# Altium PCB esp32_c6_a1.PcbDoc
Units mm, origin at the board's own origin, x right, y up, seen from the top; angles counter-clockwise.
Board outline 50 x 20 mm, 4 copper layers (Top Layer, P1, P2, Bottom Layer), stack 0.97 mm thick; 102 components, 44 nets, 244 pads, 294 vias.
Unrouted connection lines stored in the file: 1.
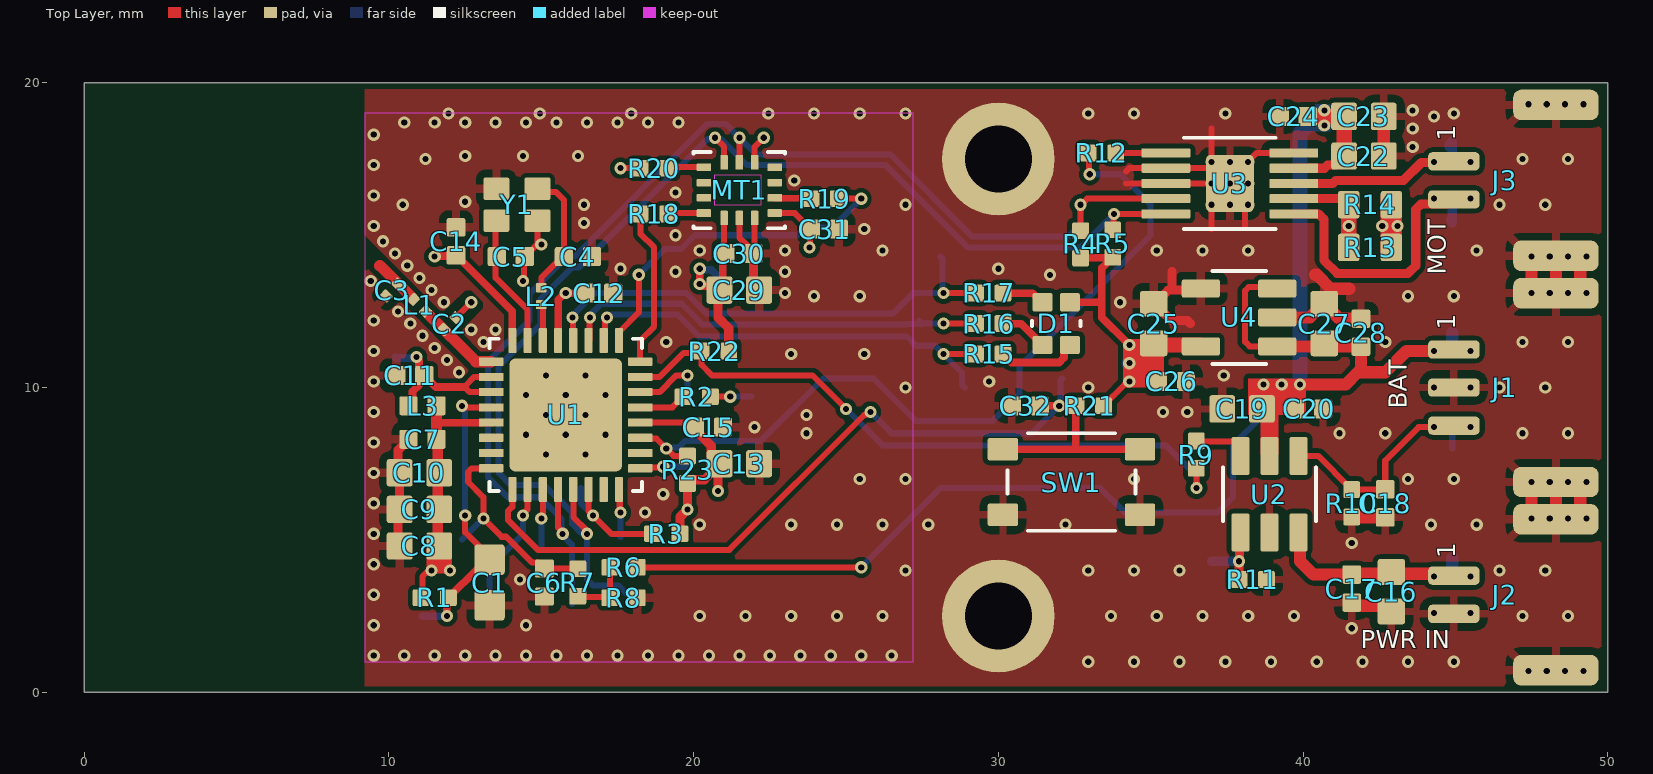
[diagram p0: Top Layer view]
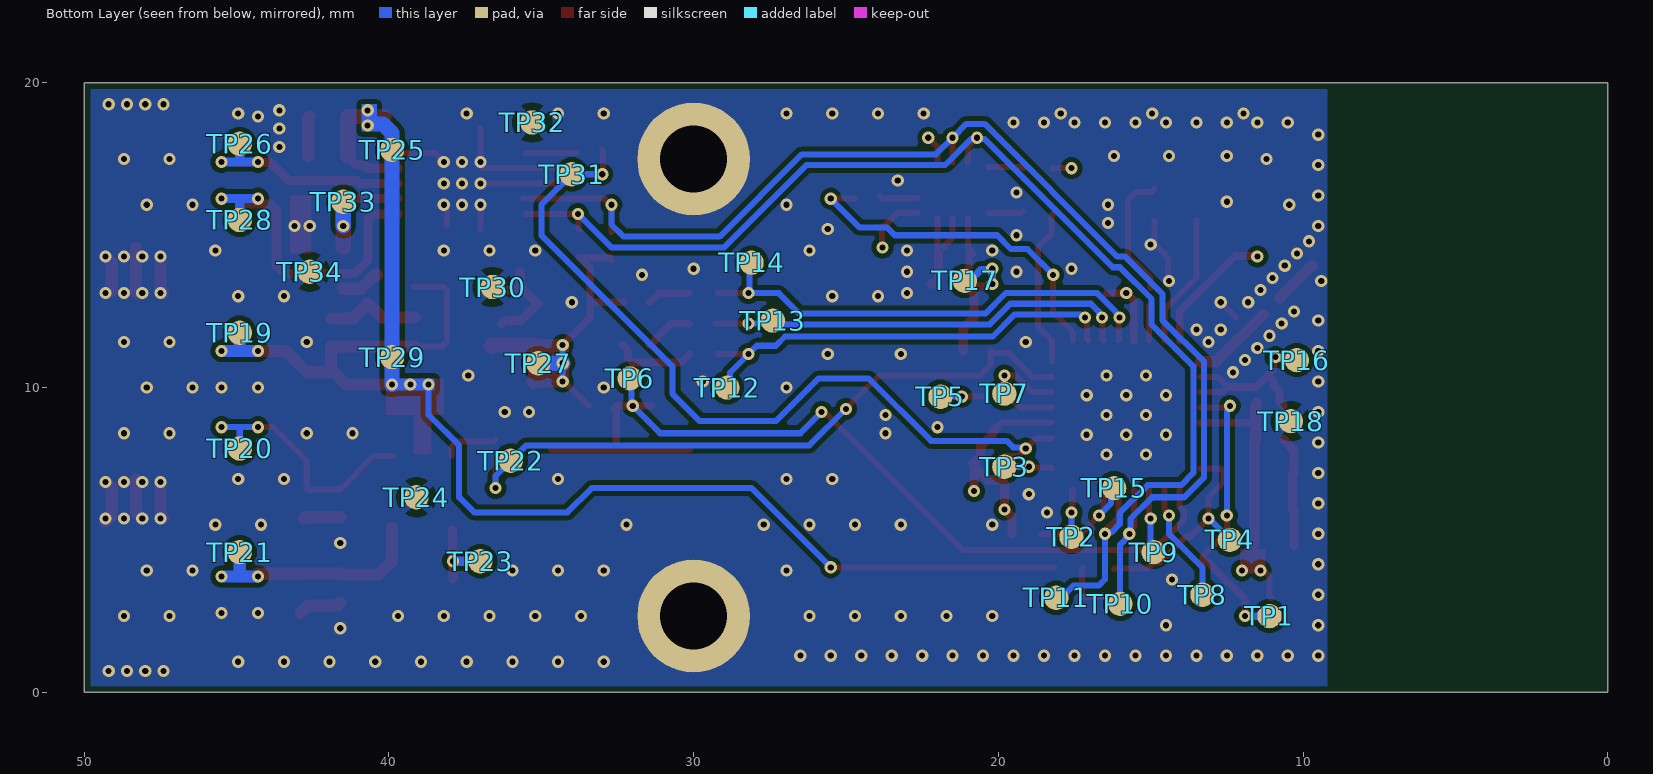
[diagram p1: Bottom Layer view, seen from below]
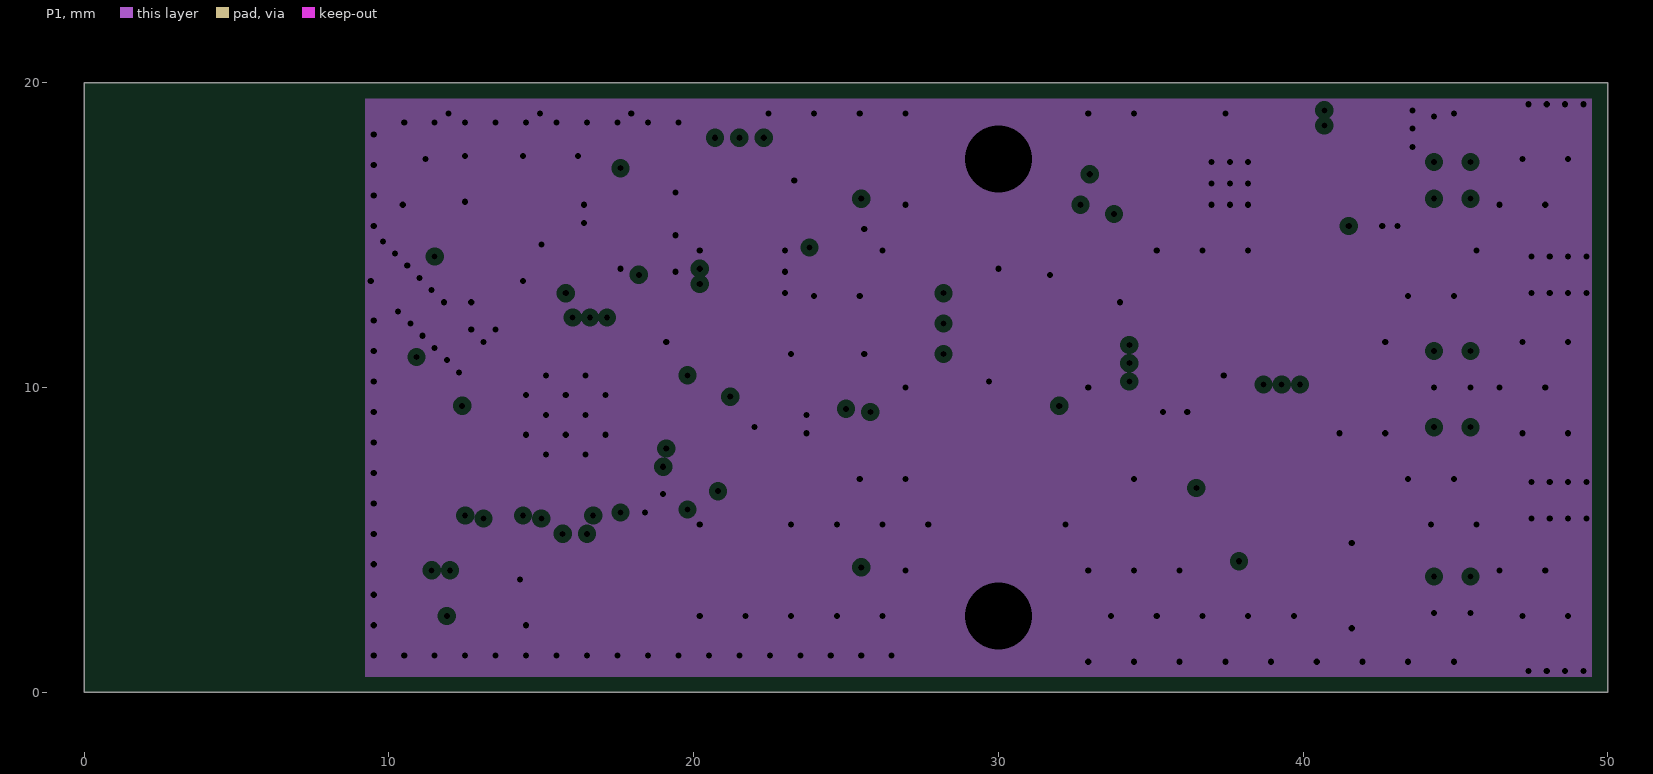
[diagram p2: P1, clearances drawn from the general rule]
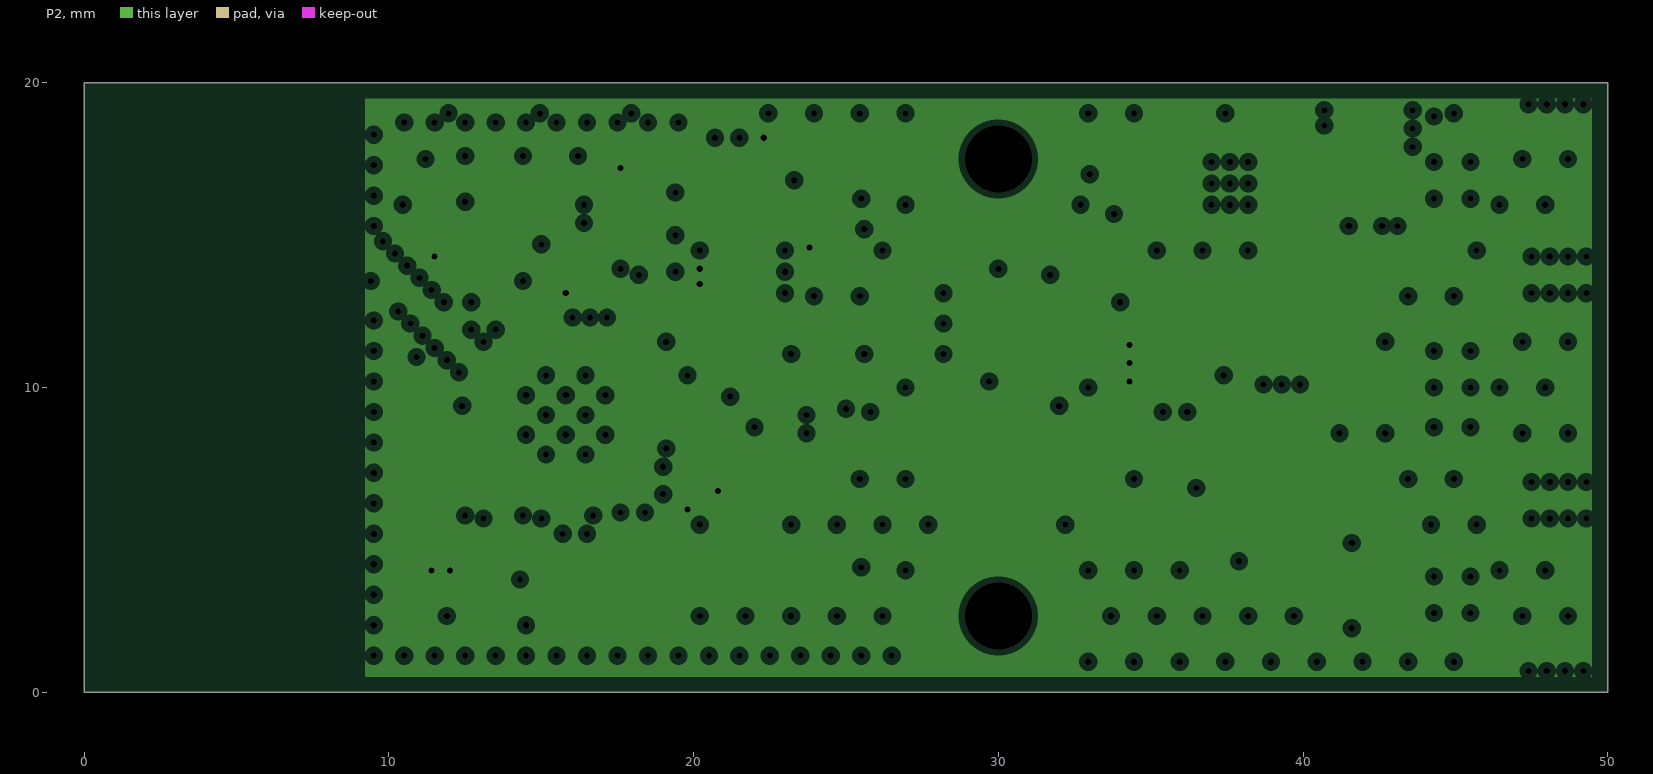
[diagram p3: P2, clearances drawn from the general rule]
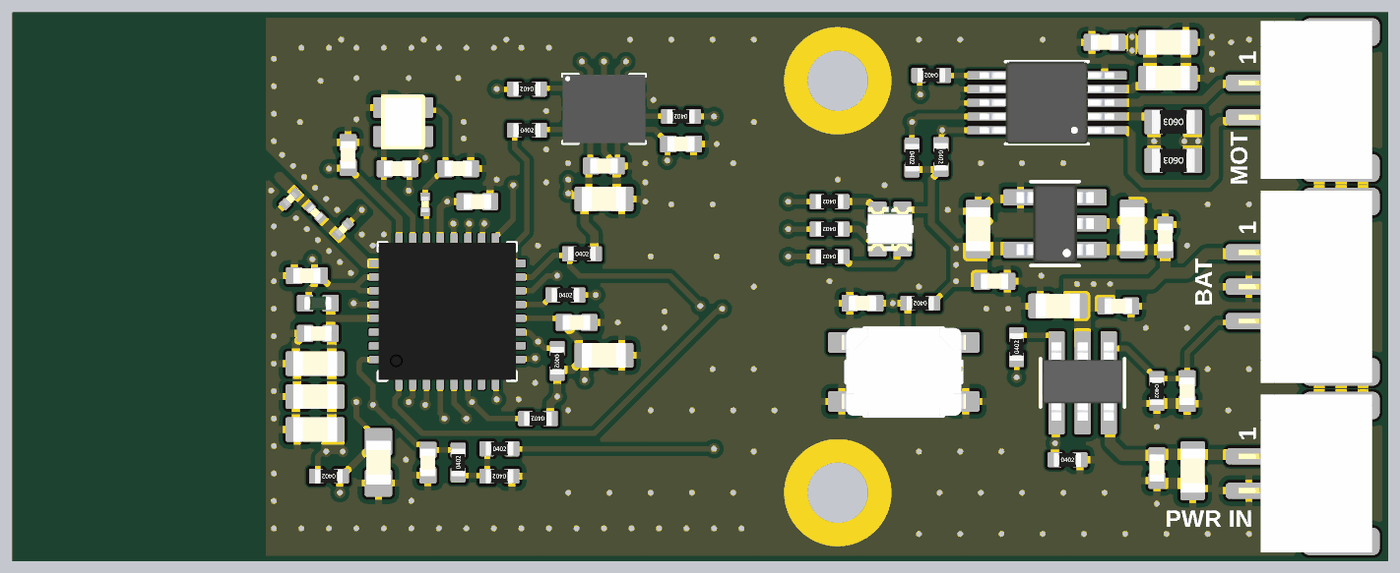
[diagram p4: 3D render of the assembled board from above, using the file's embedded part models]

## Layer stack, top to bottom
Top Solder: solder mask 0.0102, Solder Resist, Dk 3.5
Top Layer: signal copper 0.035
D1: dielectric 0.21, FR-4, Dk 4.4
P1: plane copper 0.0152, net GND
D2: dielectric 0.45, FR-4, Dk 4.6
P2: plane copper 0.0152, net +3V3
D3: dielectric 0.21, FR-4, Dk 4.4
Bottom Layer: signal copper 0.035
Bottom Solder: solder mask 0.0102, Solder Resist, Dk 3.5

## Board outline
0,0 50,0 50,20 0,20

## Design rules (kind name [scope] priority, off if disabled: settings)
BoardOutlineClearance [All] p1: gap=0.2 ignorepadtopadclearanceinfootprint=FALSE
Clearance Clearance_TPs [HasFootprint('tp_round_80') vs HasFootprint('tp_round_80')] p1: gap=1.2 ignorepadtopadclearanceinfootprint=TRUE
Clearance [All] p2: gap=0.152 ignorepadtopadclearanceinfootprint=TRUE except(0.254: THPad-THPad THPad-Via THPad-Fill THPad-Poly THPad-Region THPad-Text THPad-Hole)
Height [All] p1: minheight=0 maxheight=35 prefheight=12.7
HoleSize [All] p1: absolutevalues=TRUE maxlimit=5 minlimit=0.2 maxpercent=80.000 minpercent=20.000
HoleToHoleClearance [All] p1: gap=0.25 allowstackedmicrovias=TRUE
Length [All] p1: maxlimit=2540 minlimit=0
MatchedLengths MatchedLengths_DSI [InDifferentialPairClass('DSI')] p1: tolerance=0.5 checknetsindiffpair=FALSE checkdiffpairvsdiffpair=TRUE checkxsignals=TRUE checkothers=TRUE
MatchedLengths MatchedLengths_HDMI [InDifferentialPairClass('HDMI')] p2: tolerance=0.5 checknetsindiffpair=FALSE checkdiffpairvsdiffpair=TRUE checkxsignals=TRUE checkothers=TRUE
MatchedLengths MatchedLengths_ETH [InDifferentialPairClass('ETH')] p3: tolerance=0.5 checknetsindiffpair=FALSE checkdiffpairvsdiffpair=TRUE checkxsignals=TRUE checkothers=TRUE
MatchedLengths [InAnyDifferentialPair] p4: tolerance=0.5 checknetsindiffpair=TRUE checkdiffpairvsdiffpair=FALSE checkxsignals=FALSE checkothers=FALSE
MinimumAnnularRing [All] p1: minimumring=0.1
MinimumSolderMaskSliver [All] p1: minsoldermaskwidth=0.01
NetAntennae [All and not InNetClass('Antenna')] p1: netantennaetolerance=0
PlaneClearance [All] p1: clearance=0.2
PlaneConnect [All] p1: pad.planeconnectstyle=Relief pad.reliefexpansion=0.508 pad.reliefentries=4 pad.reliefconductorwidth=0.254 pad.reliefairgap=0.254 via.planeconnectstyle=Direct via.reliefexpansion=0.508 via.reliefentries=4 via.reliefconductorwidth=0.254 via.reliefairgap=0.254
PolygonConnect [All] p1: thpad.connectstyle=Relief thpad.reliefconductorwidth=0.254 thpad.reliefentries=4 thpad.polygonreliefangle="90 Angle" thpad.airgapwidth=0.254 thpad.conductorbypadedge=TRUE thpad.mindistance=0.381 thpad.enablemindistance=FALSE smdpad.connectstyle=Relief smdpad.reliefconductorwidth=0.254 smdpad.reliefentries=4 smdpad.polygonreliefangle="90 Angle" smdpad.airgapwidth=0.254 smdpad.conductorbypadedge=TRUE smdpad.mindistance=0.381 smdpad.enablemindistance=FALSE via.connectstyle=Direct via.reliefconductorwidth=0.254 via.reliefentries=4 via.polygonreliefangle="90 Angle" via.airgapwidth=0.254
RoutingVias [All] p1: holewidth=0.3 width=0.5 viastyle="Through Hole" minholewidth=0.2 minwidth=0.45 maxholewidth=0.3 maxwidth=0.6 useviatemplates=TRUE viatemplateguid#1={9D186E32-C681-4B0F-AA81-C389DA1EADFB} viatemplateguid#2={45BA9FE7-AB63-4574-B158-BBA0DE552227} viatemplatename#1=v40h20m0mx0(Tol5-5) viatemplatename#2=v50h30m0mx0(Tol5-5)
SilkToSilkClearance [All] p1: silktosilkclearance=0.1
SilkToSolderMaskClearance [IsPad] p1: minsilkscreentomaskgap=0.1 clearancetoexposedcopper=TRUE
SolderMaskExpansion [All] p1: expansion=0.102 istentingtop=FALSE
StubLength [All] p1: limit=25.4
SupplyNets "Schematic Supply Nets_4" [InNet('+3V3P')] p1: voltage=0.000
SupplyNets "Schematic Supply Nets_3" [InNet('GND')] p2: voltage=0.000
SupplyNets "Schematic Supply Nets_2" [InNet('+V_POWER_IN')] p3: voltage=0.000
SupplyNets "Schematic Supply Nets_1" [InNet('+V_BAT')] p4: voltage=0.000
SupplyNets "Schematic Supply Nets" [InNet('+3V3')] p5: voltage=0.000
ViasUnderSMD [All] p1: allowed=TRUE
Width Width_Antenna [InNetClass('Antenna')] p1: maxlimit=0.368 minlimit=0.368 preferedwidth=0.368 impedanceprofiledriven=TRUE impedanceprofileid={4490BFD0-1E95-46B7-8834-676BFD36805F} impedanceprofilevalue=50.000000 minimp=50.000000 maximp=50.000000 favimp=50.000000
Width [All] p2: maxlimit=3 minlimit=0.152 preferedwidth=0.254 minimp=50.000000 maximp=50.000000 favimp=50.000000
21 further rules are at their usual default settings.

## Classes and differential pairs
net class Antenna: LNA_IN RF_ANTENNA
component class SoC: C1 C2 C3 C4 C5 C6 C7 C8 C9 C10 C11 C12 C13 C14 C15 L1 L2 L3 R1 R2 R3 R4 R5 R6 R7 R8 R22 R23 TP1 TP2 TP3 TP4 TP5 TP6 TP7 TP8 TP9 TP10 TP11 TP12 TP13 TP14 TP15 TP16 TP17 TP18 U1 Y1
component class Sensors: C29 C30 C31 C32 D1 MT1 R15 R16 R17 R18 R19 R20 R21 SW1
component class Power: C16 C17 C18 C19 C20 C22 C23 C24 C25 C26 C27 C28 J1 J2 J3 R9 R10 R11 R12 R13 R14 TP19 TP20 TP21 TP22 TP23 TP24 TP25 TP26 TP27 TP28 TP29 TP30 TP31 TP32 TP33 TP34 U2 U3 U4

## Components (designator, comment, footprint, x,y, rotation, side; value= is the part's Value field where it differs from the comment)
C1 "0603" C_0603#1 13.3,3.6 r90 top value=1u
C2 "0201" C_0201 12,12.1 r225 top value=TBD
C3 "0201" C_0201 10.1,13.2 r45 top value=TBD
C4 "0402" C_0402 16.2,14.3 r0 top value=16pF
C5 "0402" C_0402 14,14.3 r0 top value=16pF
C6 "0402" C_0402 15.1,3.6 r90 top value=100n
C7 "0402" C_0402 11.1,8.3 r0 top value=100n
C8 "0603" C_0603#2 11,4.8 r0 top value=1u
C9 "0603" C_0603#2 11,6 r0 top value=4.7u
C10 "0603" C_0603#2 11,7.2 r0 top value=4.7u
C11 "0402" C_0402 10.7,10.4 r0 top value=100n
C12 "0402" C_0402 16.9,13.1 r180 top value=100n
C13 "0603" C_0603#2 21.5,7.5 r180 top value=1u
C14 "0402" C_0402 12.2,14.8 r270 top value=100n
C15 "0402" C_0402 20.5,8.7 r180 top value=100n
C16 "0603" C_0603#2 42.9,3.3 r90 top value=4.7u
C17 "0402" C_0402 41.6,3.4 r90 top value=100n
C18 "0402" C_0402 42.7,6.2 r90 top value=100n
C19 "0603" C_0603#2 38,9.3 r0 top value=4.7u
C20 "0402" C_0402 40.2,9.3 r180 top value=100n
C22 "0603" C_0603#2 42,17.6 r180 top value=4.7u
C23 "0603" C_0603#2 42,18.9 r180 top value=4.7u
C24 "0402" C_0402 39.7,18.9 r0 top value=100n
C25 "0603" C_0603#2 35.1,12.1 r270 top value=4.7u
C26 "0402" C_0402 35.7,10.2 r180 top value=100n
C27 "0603" C_0603#2 40.7,12.1 r270 top value=4.7u
C28 "0402" C_0402 41.9,11.8 r270 top value=100n
C29 "0603" C_0603#2 21.5,13.2 r180 top value=4.7u
C30 "0402" C_0402 21.5,14.4 r0 top value=100n
C31 "0402" C_0402 24.3,15.2 r0 top value=10n
C32 "0402" C_0402 30.9,9.4 r180 top value=100n
D1 "EAST1616RGBA3" LED_EAST1616RGBA3 31.9,12.1 r90 top
J1 "SM03B-GHS-TB" jst_sm03b-ghs-tb 46.9,10 r90 top
J2 "SM02B-GHS-TB" JST-SM02B-GHS-TB 46.9,3.2 r90 top
J3 "SM02B-GHS-TB" JST-SM02B-GHS-TB 46.9,16.8 r90 top
L1 "0201" L_0201 11,12.7 r135 top value=TBD
L2 "0201" L_0201 15,13 r270 top value=?
L3 "0402" L_0402 11.1,9.4 r180 top value=2nH
MT1 "ICM-42605" XDCR_ICM-42605 21.5,16.478 r0 top
R1 "0402" R_0402 11.5,3.1 r180 top value=10k
R2 "0402" R_0402 20.1,9.7 r0 top value=499R
R3 "0402" R_0402 19.1,5.2 r180 top value=10k
R4 "0402" R_0402 32.7,14.7 r270 top value=10k
R5 "0402" R_0402 33.752,14.726 r270 top value=10k
R6 "0402" R_0402 17.7,4.1 r0 top value=475k
R7 "0402" R_0402 16.2,3.6 r90 top value=499R
R8 "0402" R_0402 17.7,3.1 r180 top value=475k
R9 "0402" R_0402 36.5,7.8 r90 top value=33R
R10 "0402" R_0402 41.6,6.2 r270 top value=100k
R11 "0402" R_0402 38.35,3.7 r0 top value=2.7k
R12 "0402" R_0402 33.4,17.7 r180 top value=33R
R13 "0603" R_0603 42.2,14.6 r180 top value=1R
R14 "0603" R_0603 42.2,16 r180 top value=1R
R15 "0402" R_0402 29.7,11.1 r180 top value=499R
R16 "0402" R_0402 29.7,12.1 r180 top value=499R
R17 "0402" R_0402 29.7,13.1 r180 top value=499R
R18 "0402" R_0402 18.7,15.7 r0 top value=33R
R19 "0402" R_0402 24.3,16.2 r180 top value=33R
R20 "0402" R_0402 18.7,17.2 r180 top value=10k
R21 "0402" R_0402 33,9.4 r180 top value=10k
R22 "0402" R_0402 20.7,11.2 r0 top value=10k
R23 "0402" R_0402 19.8,7.3 r270 top value=10k
SW1 "TL3365AF180QG" SW_TL3365AF180QG 32.4,6.9 r180 top
TP1 "TP" tp_round_80 11.1,2.5 r90 bottom
TP2 "TP" tp_round_80 17.6,5.1 r90 bottom
TP3 "TP" tp_round_80 19.8,7.4 r90 bottom
TP4 "TP" tp_round_80 12.4,5 r90 bottom
TP5 "TP" tp_round_80 21.9,9.7 r90 bottom
TP6 "TP" tp_round_80 32.1,10.3 r90 bottom
TP7 "TP" tp_round_80 19.8,9.8 r90 bottom
TP8 "TP" tp_round_80 13.3,3.2 r90 bottom
TP9 "TP" tp_round_80 14.9,4.6 r90 bottom
TP10 "TP" tp_round_80 16,2.9 r90 bottom
TP11 "TP" tp_round_80 18.1,3.1 r90 bottom
TP12 "TP" tp_round_80 28.9,10 r90 bottom
TP13 "TP" tp_round_80 27.4,12.2 r90 bottom
TP14 "TP" tp_round_80 28.1,14.1 r90 bottom
TP15 "TP" tp_round_80 16.2,6.7 r90 bottom
TP16 "TP" tp_round_80 10.2,10.9 r90 bottom
TP17 "TP" tp_round_80 21.1,13.5 r90 bottom
TP18 "TP" tp_round_80 10.4,8.9 r90 bottom
TP19 "TP" tp_round_80 44.9,11.8 r90 bottom
TP20 "TP" tp_round_80 44.9,8 r90 bottom
TP21 "TP" tp_round_80 44.9,4.6 r90 bottom
TP22 "TP" tp_round_80 36,7.6 r90 bottom
TP23 "TP" tp_round_80 37,4.3 r90 bottom
TP24 "TP" tp_round_80 39.1,6.4 r90 bottom
TP25 "TP" tp_round_80 39.9,17.8 r90 bottom
TP26 "TP" tp_round_80 44.9,18 r90 bottom
TP27 "TP" tp_round_80 35.1,10.8 r180 bottom
TP28 "TP" tp_round_80 44.9,15.5 r90 bottom
TP29 "TP" tp_round_80 39.9,11 r90 bottom
TP30 "TP" tp_round_80 36.6,13.3 r180 bottom
TP31 "TP" tp_round_80 34,17 r90 bottom
TP32 "TP" tp_round_80 35.3,18.7 r90 bottom
TP33 "TP" tp_round_80 41.5,16.1 r90 bottom
TP34 "TP" tp_round_80 42.6,13.8 r90 bottom
U1 "ESP32-C6FH4" QFN50P500X500X90-33N 15.8,9.1 r0 top
U2 "BQ21040DBVT" SOT95P280X110-6N 38.9,6.5 r270 top
U3 "DRV8830DGQR" IC_XTR111AIDGQR 37.6,16.7 r180 top
U4 "TPS7A2033PDBVR" SOT95P280X110-5N 37.9,12.3 r180 top
Y1 "ECS-400-10-37B2-CKY-TR" XTAL_ECS-400-10-37B2-CKY-TR 14.2,16 r270 top

## Footprints (in the part's own frame and the unit in brackets; to place one, negate y for a bottom-side part, rotate by r counter-clockwise, add the part's x,y. Pads: shape width x height; smd on the part's side, far side on the other; paste and mask are expansions set on the pad)
C_0201 [mm] "Chip Capacitor"
  rrect20% 0.3x0.35 smd: 1(-0.275,0) 2(0.275,0)
  body extent -0.3,-0.15 0.3,0.15, height 0.32
C_0402 [mm] "Chip Capacitor, Body 1.0x0.6mm, IPC Medium Density"
  rrect20% 0.6x0.62 smd: 1(-0.46,0) 2(0.46,0)
  body extent -0.5,-0.27 0.5,0.28, height 0.5
C_0603#1 [mm] "Chip Capacitor, Body 1.6x0.8mm, IPC Medium Density"
  rrect20% 1x1 smd: 1(-0.75,0) 2(0.75,0)
  body extent -0.8,-0.45 0.8,0.45, height 0.81
C_0603#2 [mm] "Chip Capacitor, Body 1.6x0.8mm, IPC High Density"
  rrect20% 0.85x0.9 smd: 1(-0.65,0) 2(0.65,0)
  body extent -0.8,-0.45 0.8,0.45, height 0.81
IC_XTR111AIDGQR [mm]
  rrect20% 1.6x0.3 smd: 1(-2.1,1) 2(-2.1,0.5) 3(-2.1,0) 4(-2.1,-0.5) 5(-2.1,-1) 6(2.1,-1) 7(2.1,-0.5) 8(2.1,0) 9(2.1,0.5) 10(2.1,1)
  rrect20% 1.57x1.88 smd: 11(0,0)
  silkscreen extent -1.5,-1.5 1.5,1.5, body extent -2.45,-1.5 2.45,1.5, height 1.1
JST-SM02B-GHS-TB [mm]
  rrect50% 0.6x1.7 smd: 1(0.625,1.95) 2(-0.625,1.95)
  rrect50% 1x2.8 smd: MP1(-2.475,-1.4) MP2(2.475,-1.4)
  body extent -2.88,-2.52 2.88,2.33, height 4.35
jst_sm03b-ghs-tb [mm]
  rrect50% 0.6x1.7 smd: 1(1.25,1.95) 2(0,1.95) 3(-1.25,1.95)
  rrect50% 1x2.8 smd: MP1(-3.1,-1.4) MP2(3.1,-1.4)
  body extent -3.5,-2.52 3.5,2.33, height 4.3
L_0201 [mm] "Chip Inductor"
  rrect20% 0.3x0.35 smd: 1(-0.275,0) 2(0.275,0)
  body extent -0.3,-0.15 0.3,0.15, height 0.3
L_0402 [mm] "Chip Inductor, Body 1.0x0.6mm, IPC Medium Density"
  rrect20% 0.6x0.62 smd: 1(-0.46,0) 2(0.46,0)
  body extent -0.51,-0.25 0.51,0.25, height 0.52
LED_EAST1616RGBA3 [mm]
  rrect20% 0.6x0.65 smd: 1(0.7,0.45) 2(-0.7,0.45) 3(0.7,-0.45) 4(-0.7,-0.45)
  silkscreen extent -0.08,-0.8 0.08,0.8, body extent -0.8,-0.8 0.8,0.8, height 0.35
QFN50P500X500X90-33N [mm]
  rrect20% 0.81x0.27 smd mask+0.05: 1(-2.445,1.75) 2(-2.445,1.25) 3(-2.445,0.75) 4(-2.445,0.25) 5(-2.445,-0.25) 6(-2.445,-0.75) 7(-2.445,-1.25) 8(-2.445,-1.75) 17(2.445,-1.75) 18(2.445,-1.25) 19(2.445,-0.75) 20(2.445,-0.25) 21(2.445,0.25) 22(2.445,0.75) 23(2.445,1.25) 24(2.445,1.75)
  rrect20% 0.27x0.81 smd mask+0.05: 9(-1.75,-2.445) 10(-1.25,-2.445) 11(-0.75,-2.445) 12(-0.25,-2.445) 13(0.25,-2.445) 14(0.75,-2.445) 15(1.25,-2.445) 16(1.75,-2.445) 25(1.75,2.445) 26(1.25,2.445) 27(0.75,2.445) 28(0.25,2.445) 29(-0.25,2.445) 30(-0.75,2.445) 31(-1.25,2.445) 32(-1.75,2.445)
  rrect10% 3.7x3.7 smd paste-2539.97 mask+0.05: 33(0,0)
  silkscreen extent -2.5,-2.5 2.5,2.5, body extent -2.5,-2.5 2.5,2.5, height 1.05
R_0402 [mm] "Chip Capacitor, Body 1.0x0.5mm, IPC High Density"
  rrect20% 0.55x0.55 smd: 1(-0.45,0) 2(0.45,0)
  body extent -0.5,-0.25 0.5,0.25, height 0.35
R_0603 [mm] "Chip Capacitor, Body 1.6x0.8mm, IPC High Density"
  rrect20% 0.7x0.9 smd: 1(-0.7,0) 2(0.7,0)
  body extent -0.77,-0.43 0.77,0.43, height 0.45
SOT95P280X110-5N [mm]
  rrect20% 1.25x0.59 smd: 1(-1.255,0.95) 2(-1.255,0) 3(-1.255,-0.95) 4(1.255,-0.95) 5(1.255,0.95)
  silkscreen extent -0.88,-1.53 0.88,1.53, body extent -1.4,-1.45 1.4,1.45, height 1.45
SOT95P280X110-6N [mm]
  rrect20% 1.25x0.59 smd: 1(-1.255,0.95) 2(-1.255,0) 3(-1.255,-0.95) 4(1.255,-0.95) 5(1.255,0) 6(1.255,0.95)
  silkscreen extent -0.88,-1.53 0.88,1.53, body extent -1.47,-1.46 1.37,1.46, height 1.14
SW_TL3365AF180QG [mm]
  rrect20% 1x0.75 smd: 1(-2.25,-1.075) 2(2.25,-1.075) 3(-2.25,1.075) 4(2.25,1.075)
  silkscreen extent -2.1,-1.6 2.1,1.6, body extent -2.25,-1.6 2.25,1.6, height 2.53
tp_round_80 [mm]
  round 0.8 smd paste-1 mask+0.05: 1(0,0)
XDCR_ICM-42605 [mm]
  rrect20% 0.475x0.25 smd paste-1 mask+0.05: 1(-1.162,0.75) 2(-1.162,0.25) 3(-1.162,-0.25) 4(-1.162,-0.75) 8(1.162,-0.75) 9(1.162,-0.25) 10(1.162,0.25) 11(1.162,0.75)
  rrect20% 0.25x0.475 smd paste-1 mask+0.05: 5(-0.5,-0.913) 6(0,-0.913) 7(0.5,-0.913) 12(0.5,0.913) 13(0,0.913) 14(-0.5,0.913)
  Top Layer keep-out region: 0.7,-0.5 -0.8,-0.5 -0.8,0.5 0.7,0.5
  silkscreen extent -1.5,-1.25 1.5,1.25, body extent -1.5,-1.25 1.5,1.25, height 0.95
XTAL_ECS-400-10-37B2-CKY-TR [mm]
  rrect20% 0.75x0.85 smd: 1(-0.525,0.675) 2(-0.525,-0.675) 3(0.525,-0.675) 4(0.525,0.675)
  body extent -0.8,-1 0.8,1, height 0.5

## Part data
C1 C8 C13: library part C_0603, "SMD 0603 Ceramic Chip Capacitor", Manufacturer=Samsung, MPN=CL10B105KP8NNNC, Part Number=?, Cad Data=?, List Code=?
C2 C3: library part C_0201, "SMD 0201 Ceramic Chip Capacitor", Manufacturer=?, Cad Data=?, List Code=?, Part Number=?
C4 C5: library part C_0402, "SMD 0402 Ceramic Chip Capacitor", Manufacturer=Murata, MPN=GJM1555C1H160FB01J, Part Number=?, Cad Data=?, List Code=?
C6 C7 C11 C12 C14 C15 C17 C18 C20 C24 C26 C28 C30 C32: library part C_0402, "SMD 0402 Ceramic Chip Capacitor", Manufacturer=Samsung, MPN=CL05B104KP5NNNC, Part Number=?, Cad Data=?, List Code=?
C9 C10 C16 C19 C22 C23 C25 C27 C29: library part C_0603, "SMD 0603 Ceramic Chip Capacitor", Manufacturer=Samsung, MPN=CL10A475KP8NNNC, Part Number=?, Cad Data=?, List Code=?
C31: library part C_0402, "SMD 0402 Ceramic Chip Capacitor", Manufacturer=Samsung, MPN=CL05B103KB5NNNC, Part Number=?, Cad Data=?, List Code=?
D1: "Red, Green, Blue (RGB) - LED Indication - Discrete 1.95V Red, 2.8V Green, 2.8V Blue 0606 (1616 Metric)", Package="0606 Everlight", Availability="In Stock", Check_prices=https://www.snapeda.com/parts/EAST1616RGBA3/Everlight+Electronics+Co+Ltd/view-part/?ref=eda, MF="Everlight Electronics", MP=EAST1616RGBA3, Price=None, Purchase-URL=https://pricing.snapeda.com/search/part/EAST1616RGBA3/?ref=eda, SnapEDA_Link=https://www.snapeda.com/parts/EAST1616RGBA3/Everlight+Electronics+Co+Ltd/view-part/?ref=snap
J1: "CONN HEADER SMD 3POS 1.25MM", Manufacturer=JST, MPN=SM03B-GHS-TB
J2 J3: "CONN HEADER SMD 2POS 1.25MM", Manufacturer=JST, MPN=SM02B-GHS-TB
L1 L2: library part L_0201, "SMD 0201 Inductor", Manufacturer=?, Cad Data=?, List Code=?, Part Number=?
L3: library part L_0402, "SMD 0402 Inductor", Manufacturer=Murata, MPN=LQG15HN2N0C02D, Part Number=?, Cad Data=?, List Code=?
MT1: Package=None, Availability=Unavailable, MP=ICM-42605, Price=None
R1 R3 R4 R5 R10 R20 R21 R22 R23: library part R_0402, "SMD 0402 Rectangular Thick Film Chip Resistor", Manufacturer=Yageo, MPN=RC0402FR-0710KL, Part Number=?, Cad Data=?, List Code=?
R2 R7 R15 R16 R17: library part R_0402, "SMD 0402 Rectangular Thick Film Chip Resistor", Manufacturer=Yageo, MPN=RC0402FR-07499RL, Part Number=?, Cad Data=?, List Code=?
R6 R8: library part R_0402, "SMD 0402 Rectangular Thick Film Chip Resistor", Manufacturer=Yageo, MPN=RC0402FR-07475KL, Part Number=?, Cad Data=?, List Code=?
R9 R12 R18 R19: library part R_0402, "SMD 0402 Rectangular Thick Film Chip Resistor", Manufacturer=Yageo, MPN=RC0402FR-0733RL, Part Number=?, Cad Data=?, List Code=?
R11: library part R_0402, "SMD 0402 Rectangular Thick Film Chip Resistor", Manufacturer=Yageo, MPN=RC0402FR-072K7L, Part Number=?, Cad Data=?, List Code=?
R13 R14: library part R_0603, "SMD 0603 Rectangular Thick Film Chip Resistor", Manufacturer=Yageo, MPN=RC0603FR-071RL, Part Number=?, Cad Data=?
SW1: "Tactile Switch SPST-NO Top Actuated Surface Mount", Manufacturer=E-Switch, Package=None, Availability="In Stock", Check_prices=https://www.snapeda.com/parts/TL3365AF180QG/E-Switch/view-part/?ref=eda, MPN=TL3365AF180QG, Price=None, Purchase-URL=https://pricing.snapeda.com/search/part/TL3365AF180QG/?ref=eda, SnapEDA_Link=https://www.snapeda.com/parts/TL3365AF180QG/E-Switch/view-part/?ref=snap
TP1 TP2 TP3 TP4 TP5 TP6 TP7 TP8 TP9 TP10 TP11 TP12 TP13 TP14 TP15 TP16 TP17 TP18 TP19 TP20 TP21 TP22 TP23 TP24 TP25 TP26 TP27 TP28 TP29 TP30 TP31 TP32 TP33 TP34: "Test Point"
U1: "802.15.4, Bluetooth, WiFi 802.11ax, Bluetooth v5.0, ZigbeeÂ® Transceiver Module 2.4GHz Antenna Not Included Surface Mount", Manufacturer="Espressif Systems", Package=None, Availability="In Stock", Check_prices=https://www.snapeda.com/parts/ESP32-C6FH4/Espressif+Systems/view-part/?ref=eda, MPN=ESP32-C6FH4, Price=None, Purchase-URL=https://pricing.snapeda.com/search?q=ESP32-C6FH4&ref=eda, SnapEDA_Link=https://www.snapeda.com/parts/ESP32-C6FH4/Espressif+Systems/view-part/?ref=snap
U2: "1-cell, 0.8-A Li-ion and Li-polymerymer battery charger 6-SOT-23 0 to 125", Package="SOT-23-6 Texas Instruments", Digi-Key_Part_Number=296-44196-1-ND, DigiKey-Purchase-URL=https://snapeda.com/shop?store=DigiKey&id=1216215, MF="Texas Instruments", Mouser-Purchase-URL=https://snapeda.com/shop?store=Mouser&id=1216215, MP=BQ21040DBVT, MPN=BQ21040DBVT, SnapEDA_Link=https://www.snapeda.com/parts/BQ21040DBVT/Texas%20Instruments/view-part/1216215/?ref=snap, Texas_Instruments-Purchase-URL=https://snapeda.com/shop?store=Texas+Instruments&id=1216215
U3: "6.8-V, 1-A H-bridge motor driver with speed regulation and i2c control 10-HVSSOP -40 to 85", Package="HVSSOP-10 Texas Instruments", Availability=Good, Check_prices=https://www.snapeda.com/parts/DRV8830DGQR/Texas%20Instruments/view-part/552464/?ref=eda, MF="Texas Instruments", MP=DRV8830DGQR, Price=None, Purchase-URL=https://pricing.snapeda.com/search/part/DRV8830DGQR/?ref=eda, SnapEDA_Link=https://www.snapeda.com/parts/DRV8830DGQR/Texas%20Instruments/view-part/552464/?ref=snap
U4: "Linear Voltage Regulator IC Positive Fixed 1 Output 300mA SOT-23-5", Manufacturer="Texas Instruments", MPN=TPS7A2033PDBVR
Y1: "40 MHz Â±10ppm Crystal 10pF 40 Ohms 4-SMD, No Lead", Manufacturer="ECS Inc.", Package=None, Check_prices=https://www.snapeda.com/parts/ECS-400-10-37B2-CKY-TR/ECS+Inc./view-part/?ref=eda, Digi-Key_Part_Number=50-ECS-400-10-37B2-CKY-TR-ND, MPN=ECS-400-10-37B2-CKY-TR, Purchase-URL=https://pricing.snapeda.com/search/part/ECS-400-10-37B2-CKY-TR/?ref=eda, SnapEDA_Link=https://www.snapeda.com/parts/ECS-400-10-37B2-CKY-TR/ECS+Inc./view-part/?ref=snap

## Free pads (board coordinates)
  round 3.7 hole 2.2 unplated: MH3(30,2.5) MH3(30,17.5)

## Via types
v1: diameter 0.4, hole 0.2, Top Layer to Bottom Layer, tented both sides, 294 vias

## Nets (pads, with @x,y where several pads share a name; then routed paths per layer and width w, separated by ;. In a path a pad name is that pad's centre, name@x,y a point inside that pad or via, vN(x,y) a via of type N, cw(c..) or ccw(c..) an arc to the next point about the centre after c; other vN are vias at no path point)
+3V3: C7.2 C8.2 C9.2 C10.2 C12.2 C13.2 C14.2 C15.2 C25.2 C26.2 C29.2 C30.1 C31.1 D1.3 L3.1 MT1.5 MT1.8 MT1.12 R1.2 R3.1 R4.2 R5.2 R20.2 R21.1 R22.2 R23.2 TP17.1 TP27.1 U1.5 U1.20 U1.29 U1.32 U4.5 | length 41.8
  Top Layer w0.2: R1.2 11.1,3.15 11.1,3.8 v1@11.259,3.959 ; v1(17.6,17.2) 18.2,17.2 R20.2@18.225,17.175 ; U1.20 19.89,8.85 C15.2 ; C30.1@21,14.5 MT1.5 ; MT1.12 22,17.9 v1(22.3,18.2) ; MT1.8 23.322,15.728 C31.1@23.75,15.3 ; v1(23.8,14.6) 23.82,14.62 23.82,15.18 C31.1 ; R21.1 34.15,10.1 34.2,10.1 v1(34.3,10.2)
  Top Layer w0.25: v1(11.5,14.3) 11.52,14.32 12.18,14.32 C14.2 ; 11.55,8.85 11.56,8.85 U1.5 ; C14.2@12.3,14.25 14.05,12.5 U1.32 ; U1.29 15.55,12.883 15.767,13.1 v1(15.8,13.1) C12.2 ; v1(20.2,13.4) 20.241,13.4 20.316,13.325 20.725,13.325 C29.2@20.8,13.25 ; v1@20.2,13.525 v1(20.2,13.9) ; C30.1@20.865,14.4 20.9,14.435 C30.1@20.9,14.5 ; C29.2@20.952,13.402 C30.1@20.952,14.312 ; D1.3@32.3,12.8 D1.3 33.3,12.8 33.4,12.9 ; R4.2@32.7,14.2 32.763,14.263 R5.2@33.739,14.263 ; R5.2 R5.2@33.739,14.263 ; v1(34.3,11.4) 34.225,11.475 33.4,12.3 33.4,12.9 ; 33.4,12.9 33.4,13.924 R5.2@33.739,14.263
  Top Layer w0.3: R3.1 19.55,5.75 v1(19.8,6) R23.2@19.8,6.8 ; R23.2 19.925,6.975 20.35,6.975 20.8,7.425 C13.2@20.8,7.5 ; C15.2@20.04,8.69 20.19,8.54 20.19,8.468 20.575,8.083 20.575,7.775 C13.2@20.825,7.525 ; v1(20.8,6.6) 20.8,7.45 C13.2 ; C29.2@20.9,13.2 20.8,13.1 20.8,12.3 21.15,11.95 R22.2
  Top Layer w0.35: L3.1@11.5,9.5 11.56,9.44 11.56,8.85 C7.2 ; C7.2@11.605,8.295 11.605,4.845 C8.2
  Top Layer w0.5: C25.2@35.1,11.3 C25.2@35.175,11.375 ; C25.2@35.2,11.395 36.6,11.395 U4.5 ; C25.2@35.2,11.4 35.19,11.39 35.19,10.25 C26.2
  Bottom Layer w0.25: v1(20.2,13.4) v1@20.2,13.8 ; v1(20.2,13.9) 20.229,13.871 20.58,13.871 20.951,13.5 TP17.1
  Bottom Layer w0.5: v1(34.3,10.8) TP27.1
  other v1: 11.4,4 12,4
+3V3P: C11.2 L3.2 TP16.1 U1.2 U1.3 | length 6
  Top Layer w0.2: 12.478,10.022 12.805,10.35 U1.2 ; 12.535,9.965 12.65,9.85 U1.3
  Top Layer w0.25: L3.2 10.773,9.533 10.773,9.872 10.985,10.084 10.985,10.225 C11.2 ; v1(10.9,11) 10.9,10.959 10.985,10.874 10.985,10.575 C11.2 ; 12.483,10.017 11.543,10.017 11.231,10.329 C11.2
  Bottom Layer w0.25: TP16.1@10.2,11 10.229,10.971 10.871,10.971 v1(10.9,11)
+V_BAT: C19.2 C20.2 C22.2 C23.2 C24.2 C27.2 C28.2 J1.1 R6.2 TP19.1 TP25.1 TP29.1 U2.2 U3.4 U4.1 U4.3 | length 53.4
  Top Layer w0.2: R6.2 v1(25.5,4.1) ; U4.1 38.25,11.35 38.1,11.5 38.1,13.183 38.217,13.3 U4.3@39.2,13.3
  Top Layer w0.3: U3.4 40.7,17.2 40.8,17.3 41.075,17.3 C22.2@41.3,17.525
  Top Layer w0.4: U4.1 C28.2@41.79,11.35 ; v1@39.8,10.1 v1(39.9,10.1) 41.4,10.1 41.8,10.5 41.9,10.5 ; C28.2 41.9,10.5 ; J1.1@44.9,11.2 v1(44.3,11.2) 43.4,11.2 42.7,10.5 41.9,10.5
  Top Layer w0.5: C24.2 C23.2 C22.2
  Bottom Layer w0.2: v1(25.5,4.1) 28.1,6.7 33.35,6.7 34.15,5.9 37.2,5.9 37.7,6.4 37.7,8.1 38.7,9.1 v1(38.7,10.1)
  Bottom Layer w0.4: v1(44.3,11.2) 44.9,11.2 ; TP19.1 44.9,11.2 ; v1(45.5,11.2) 44.9,11.2
  Bottom Layer w0.5: v1(39.9,10.1) 39.9,18.357 40.193,18.65 v1@40.65,18.65
  other v1: 39.3,10.1 40.7,18.6 40.7,19.1
+V_POWER_IN: C16.2 C17.2 J2.1 TP21.1 U2.6 | length 8.1
  Top Layer w0.4: U2.6@39.9,5.4 39.9,4.3 40.34,3.86 C17.2 ; C17.2@41.6,3.9 42.9,3.9 42.912,3.888 44.3,3.888 v1(44.3,3.8) J2.1@44.9,3.8
  Bottom Layer w0.4: v1(44.3,3.8) 44.9,3.8 ; TP21.1@44.9,4.4 44.9,3.8 ; v1@45.4,3.8 44.9,3.8
  other v1: 45.5,3.8
BAT_C\H\G\: R9.1 R22.1 TP22.1 U1.23 | length 21.5
  Top Layer w0.2: U1.23 18.885,10.35 19.675,11.14 R22.1@20.14,11.14 ; R22.1 20.258,11.192 20.258,10.742 20.6,10.4 23.9,10.4 v1(25,9.3) ; v1(36.5,6.7) R9.1
  Bottom Layer w0.2: v1(25,9.3) 26.2,8.1 35.5,8.1 TP22.1 36.5,7.1 v1(36.5,6.7)
BAT_TS: C18.2 J1.3 R10.1 TP20.1 U2.1 | length 8.8
  Top Layer w0.2: U2.1 40.495,7.755 41.55,6.7 R10.1@41.6,6.7 ; R10.1@41.605,6.655 42.545,6.655 C18.2@42.6,6.6 ; C18.2 42.7,7.6 43.8,8.7 v1(44.3,8.7) J1.3@44.9,8.7
  Bottom Layer w0.2: v1@44.3,8.65 v1(44.3,8.7) 44.9,8.7 ; TP20.1 44.9,8.7 ; v1(45.5,8.7) 44.9,8.7
BUTTON: C32.1 R21.2 SW1.1 SW1.2 TP6.1 U1.9 | length 30.1
  Top Layer w0.2: U1.9 14.05,6.089 13.9,5.939 13.9,5.661 14.888,4.673 21.173,4.673 25.6,9.1 25.646,9.1 25.746,9.2 v1(25.8,9.2)
  Top Layer w0.25: SW1.2 32.544,7.975 ; C32.1 v1(32,9.4) R21.2@32.4,9.4 ; R21.2@32.5,9.4 R21.2@32.544,9.356 ; R21.2@32.544,9.394 R21.2@32.544,9.356 ; R21.2@32.6,9.3 R21.2@32.544,9.356 ; SW1.1 32.544,7.975 ; 32.544,7.975 R21.2@32.544,9.356
  Bottom Layer w0.2: v1(25.8,9.2) 26.5,8.5 31.1,8.5 32.038,9.438 32.038,10.238 TP6.1
DRV_FAULTN: R12.2 R23.1 TP31.1 U1.19 | length 26.5
  Top Layer w0.2: U1.19 18.267,8.328 18.772,8.328 v1(19.1,8) 19.342,7.758 19.792,7.758 R23.1 ; v1(33,17) 32.975,17.025 32.975,17.775 R12.2@33,17.8
  Bottom Layer w0.2: v1(19.1,8) 19.138,8.038 19.516,8.038 19.726,8.248 22.209,8.248 24.261,10.3 25.9,10.3 27.3,8.9 29.8,8.9 30.7,9.8 30.7,10.7 35,15 35,16 TP31.1 v1(33,17)
ESP32_ENABLE: C1.2 R1.1 TP1.1 U1.4 | length 9.5
  Top Layer w0.2: v1(12.4,9.4) 12.441,9.4 12.491,9.35 U1.4 ; v1@12.5,5.768 12.5,5.25 C1.2@13.3,4.45
  Top Layer w0.25: v1(11.9,2.5) 11.9,3.05 R1.1 12.925,4.075 13.15,4.3 C1.2@13.3,4.3
  Bottom Layer w0.2: v1(12.4,9.4) 12.4,9.346 12.5,9.246 v1(12.5,5.8)
  Bottom Layer w0.25: TP1.1 v1(11.9,2.5)
ESP32_I2C_SCL: MT1.14 R5.1 TP11.1 U1.13 U3.10 | length 41.3
  Top Layer w0.2: U1.13 16.05,5.75 16.5,5.3 v1(16.5,5.2) ; v1(20.7,18.2) 21,17.9 MT1.14@21,17.391 ; R5.1 33.776,15.2 33.776,15.676 v1(33.8,15.7) U3.10
  Bottom Layer w0.2: 16,5.9 15.1,6.8 14,6.8 13.6,7.2 13.6,10.7 14.967,12.067 14.967,12.907 16.009,13.948 16.246,13.948 19.15,16.852 19.152,16.852 20.462,18.162 20.662,18.162 v1(20.7,18.2) 20.738,18.162 20.889,18.162 21.751,17.3 26.3,17.3 29,14.6 32.7,14.6 v1(33.8,15.7) ; 16.014,5.838 16.014,5.525 16.301,5.238 16.462,5.238 v1(16.5,5.2) ; v1@16.5,5.254 16.5,3.7 16.7,3.5 17.538,3.5 17.938,3.1 TP11.1
ESP32_I2C_SDA: MT1.13 R4.1 TP10.1 U1.12 U3.9 | length 41.3
  Top Layer w0.2: U1.12 15.55,5.404 15.7,5.254 v1(15.7,5.2) ; MT1.13 v1(21.5,18.2) ; R4.1@32.7,15.1 v1(32.7,16) 32.717,16 32.917,16.2 U3.9
  Bottom Layer w0.2: TP10.1 16,4.846 15.7,5.146 v1(15.7,5.2) 15.662,5.238 15.662,5.692 14.954,6.4 13.9,6.4 13.248,7.052 13.248,10.846 14.615,12.213 14.615,13.076 14.748,13.209 15.839,14.3 16.1,14.3 20.452,18.652 21.048,18.652 v1(21.5,18.2) 22.048,17.652 26.446,17.652 29.146,14.952 32.3,14.952 32.7,15.352 v1(32.7,16)
GND: C1.1 C2.1 C3.1 C4.2 C5.2 C6.1 C7.1 C8.1 C9.1 C10.1 C11.1 C12.1 C13.1 C14.1 C15.1 C16.1 C17.1 C18.1 C19.1 C20.1 C22.1 C23.1 C24.1 C25.1 C26.1 C27.1 C28.1 C29.1 C30.2 C31.2 C32.2 J1.2 J1.MP1 J1.MP2 J2.2 J2.MP1 J2.MP2 J3.MP1 J3.MP2 MT1.6 MT1.7 pad.MH3 R8.1 R10.2 R11.2 R13.1 R14.1 SW1.3 SW1.4 TP18.1 TP24.1 TP30.1 TP32.1 TP34.1 U1.33 U2.5 U3.5 U3.7 U3.8 U3.11 U4.2 U4.4 Y1.2 Y1.4 | length 40.5
  Top Layer w0.2: C2.1 v1(12.7,12.8) ; v1(14.4,13.5) 14.43,13.53 14.43,14.23 14.5,14.3 14.5,14.35 14.875,14.725 Y1.4 ; MT1.6 21.5,14.923 21.76,14.664 21.76,14.61 21.77,14.6 C30.2@21.8,14.6 ; C30.2 22,14.44 MT1.7 ; 34.2,16.7 U3.8 v1(37,16.7) ; 34.2,17.1 34.3,17.2 U3.7 36.919,17.2 37,17.281 v1(37,17.4) 37,18.5 ; 37,15.2 v1(37,16) ; 38.1,15.3 38.1,15.9 v1(38.2,16) ; v1(38.2,17.4) 38.2,17.424 38.476,17.7 U3.5@39.6,17.7
  Top Layer w0.3: C8.1@10.3,4.8 C9.1@10.3,6 ; C10.1@10.3,7.2 10.3,7.95 10.64,8.29 C7.1 ; C9.1 C10.1 ; C30.2 21.96,13.5 22.06,13.4 C29.1@22.2,13.4 ; C25.1 C25.1@35.125,12.75 ; 35.7,13.8 35.7,13.2 ; 36.3,12.1 36.2,12.2 35.675,12.2 C25.1@35.125,12.75 ; U4.4@36.8,13.2 35.7,13.2 ; C25.1@35.125,12.75 35.575,13.2 35.7,13.2
  Top Layer w0.4: U4.2 40.225,12.3 C27.1@40.687,12.763 ; 40.4,13.7 40.456,13.7 40.911,13.245 41.52,13.245 ; C27.1 40.725,12.75 40.95,12.525 40.95,12.505 41.184,12.271 C28.1@41.889,12.271 ; C17.1 41.7,2.84 42.66,2.84 C16.1@42.9,2.6 ; R10.2 41.605,5.745 42.755,5.745 C18.1@42.8,5.7 ; C23.1@42.6,18.9 42.65,18.85 C22.1 ; J2.MP2@47.4,5.7 47.5,5.8 v1(47.5,6.9) ; J1.MP2@47.4,13.1 47.5,13.2 v1(47.5,14.3) ; v1(48.1,5.7) 48.3,5.9 J1.MP1 J1.MP1@48.3,7 ; J1.MP2 J3.MP1 J3.MP1@48.3,14.6 ; J1.MP2@49.2,13.1 49.1,13.2 49.1,14.1 v1(49.3,14.3) ; J2.MP2@49.3,5.6 49.1,5.8 49.1,6.7 v1(49.3,6.9)
  other v1: 47.4,0.7 48,0.7 48.6,0.7 49.2,0.7 32.95,1 34.45,1 35.95,1 37.45,1 38.95,1 40.45,1 41.95,1 43.45,1 44.95,1 9.5,1.2 10.5,1.2 11.5,1.2 12.5,1.2 13.5,1.2 14.5,1.2 15.5,1.2 16.5,1.2 17.5,1.2 18.5,1.2 19.5,1.2 20.5,1.2 21.5,1.2 22.5,1.2 23.5,1.2 24.5,1.2 25.5,1.2 26.5,1.2 41.6,2.1 9.5,2.2 14.5,2.2 20.2,2.5 21.7,2.5 23.2,2.5 24.7,2.5 26.2,2.5 33.7,2.5 35.2,2.5 36.7,2.5 38.2,2.5 39.7,2.5 47.2,2.5 48.7,2.5 44.3,2.6 45.5,2.6 9.5,3.2 14.3,3.7 26.95,4 32.95,4 34.45,4 35.95,4 46.45,4 47.95,4 9.5,4.2 41.6,4.9 9.5,5.2 20.2,5.5 23.2,5.5 24.7,5.5 26.2,5.5 27.7,5.5 32.2,5.5 44.2,5.5 45.7,5.5 47.5,5.7 48.7,5.7 49.3,5.7 18.4,5.9 9.5,6.2 19,6.5 48.1,6.9 48.7,6.9 25.45,7 26.95,7 34.45,7 43.45,7 44.95,7 9.5,7.2 15.15,7.8 16.45,7.8 9.5,8.2 14.5,8.45 15.8,8.45 17.1,8.45 23.7,8.5 41.2,8.5 42.7,8.5 47.2,8.5 48.7,8.5 22,8.7 15.15,9.1 16.45,9.1 23.7,9.1 9.5,9.2 35.4,9.2 36.2,9.2 14.5,9.75 15.8,9.75 17.1,9.75 26.95,10 32.95,10 44.3,10 45.5,10 46.45,10 47.95,10 9.5,10.2 29.7,10.2 15.15,10.4 16.45,10.4 37.4,10.4 12.3,10.5 11.9,10.9 23.2,11.1 25.6,11.1 9.5,11.2 11.5,11.3 13.1,11.5 19.1,11.5 42.7,11.5 47.2,11.5 48.7,11.5 11.1,11.7 12.7,11.9 13.5,11.9 10.7,12.1 9.5,12.2 10.3,12.5 11.8,12.8 34,12.8 23.95,13 25.45,13 43.45,13 44.95,13 23,13.1 47.5,13.1 48.1,13.1 48.7,13.1 49.3,13.1 11.4,13.2 9.4,13.5 11,13.6 31.7,13.7 19.4,13.8 23,13.8 17.6,13.9 30,13.9 10.6,14 48.1,14.3 48.7,14.3 10.2,14.4 20.2,14.5 23,14.5 26.2,14.5 35.2,14.5 36.7,14.5 38.2,14.5 45.7,14.5 15,14.7 9.8,14.8 19.4,15 25.6,15.2 9.5,15.3 42.6,15.3 43.1,15.3 16.4,15.4 10.45,16 16.4,16 26.95,16 37.6,16 46.45,16 47.95,16 12.5,16.1 9.5,16.3 19.4,16.4 37.6,16.7 38.2,16.7 23.3,16.8 9.5,17.3 37.6,17.4 11.2,17.5 47.2,17.5 48.7,17.5 12.5,17.6 14.4,17.6 16.2,17.6 43.6,17.9 9.5,18.3 43.6,18.5 10.5,18.7 11.5,18.7 12.5,18.7 13.5,18.7 14.5,18.7 15.5,18.7 16.5,18.7 17.5,18.7 18.5,18.7 19.5,18.7 44.3,18.9 11.95,19 14.95,19 17.95,19 22.45,19 23.95,19 25.45,19 26.95,19 32.95,19 34.45,19 37.45,19 44.95,19 43.6,19.1 47.4,19.3 48,19.3 48.6,19.3 49.2,19.3
GPIO8: R3.2 TP15.1 U1.14 | length 4.1
  Top Layer w0.2: U1.14 16.55,5.95 v1(16.7,5.8) 17.3,5.2 R3.2@18.6,5.2
  Bottom Layer w0.2: TP15.1@16.3,6.7 16.3,6.2 v1(16.7,5.8)
ICM_INT1/INT: R18.1 U1.24 | length 5.2
  Top Layer w0.2: R18.1@18.2,15.7 18.25,15.65 18.25,15.05 18.7,14.6 18.7,12 18.245,11.545 U1.24
ICM_INT2/FSYNC: R19.1 U1.25 | length 11.6
  Top Layer w0.2: U1.25 17.55,11.815 18.2,12.465 v1(18.2,13.7) ; R19.1@24.7,16.2 R19.1 v1(25.5,16.2)
  Bottom Layer w0.2: v1(18.2,13.7) 19.048,14.548 19.587,14.548 20.039,15 23.4,15 23.65,15.25 24.55,15.25 v1(25.5,16.2)
LED_PWM_BLUE: R17.2 TP14.1 U1.28 | length 16.1
  Top Layer w0.2: v1(16.027,12.3) 16.038,12.289 16.038,11.556 U1.28 ; v1(28.2,13.1) R17.2@29.2,13.1
  Bottom Layer w0.2: v1(16.027,12.3) 16.027,12.354 16.148,12.475 16.148,12.487 16.761,13.1 16.815,13.1 16.819,13.104 19.752,13.104 20.428,12.428 26.528,12.428 27.2,13.1 v1(28.2,13.1) 28.162,13.138 28.162,14.238 TP14.1@28.1,14.3
LED_PWM_GREEN: R16.2 TP13.1 U1.27 | length 14.3
  Top Layer w0.2: U1.27 16.575,11.57 16.575,12.275 v1(16.6,12.3) ; v1(28.2,12.1) R16.2@29.3,12.1
  Bottom Layer w0.2: v1(16.6,12.3) 16.6,12.354 16.7,12.454 16.7,12.487 16.965,12.752 19.607,12.752 20.282,12.076 26.983,12.076 26.992,12.085 27.463,12.085 27.472,12.076 27.4,12.148 TP13.1 27.495,12.105 27.895,12.105 27.896,12.104 28.196,12.104 v1(28.2,12.1)
LED_PWM_RED: R15.2 TP12.1 U1.26 | length 14.8
  Top Layer w0.2: U1.26 17.085,11.58 17.085,12.179 17.152,12.246 v1(17.152,12.3) ; v1(28.2,11.1) R15.2@29.2,11.1
  Bottom Layer w0.2: v1(17.152,12.3) 17.206,12.3 17.306,12.4 19.461,12.4 20.185,11.676 27.002,11.676 27.306,11.372 27.928,11.372 28.805,10.495 28.805,10.095 TP12.1
LNA_IN: C2.2 L1.1 U1.1 | length 2.7
  Top Layer w0.368: L1.1@11.3,12.4 12.85,10.85 U1.1
Motor_N: J3.2 TP28.1 U3.1 | length 11
  Top Layer w0.3: U3.1 40.508,15.7 40.683,15.524 40.683,14.183 41.119,13.747 43.447,13.747 43.7,14 43.7,15.849 43.876,16.025 44.8,16.025 J3.2 ; J3.2@44.9,16.175 J3.2@44.9,16.2
  Bottom Layer w0.3: v1@44.319,16.181 v1(44.3,16.2) 44.9,16.2 ; TP28.1@44.84,15.5 TP28.1 ; TP28.1@44.9,15.4 TP28.1 ; v1(45.5,16.2) 44.9,16.2 ; TP28.1 44.9,16.2
Motor_P: J3.1 TP26.1 U3.3 | length 7.6
  Top Layer w0.3: U3.3 40.975,16.7 41.075,16.8 43.3,16.8 43.888,17.388 44.288,17.388 v1(44.3,17.4) J3.1@45,17.4
  Bottom Layer w0.3: v1(44.3,17.4) 44.9,17.4 ; TP26.1@44.8,17.9 TP26.1@44.8,18 ; TP26.1@44.9,18.1 TP26.1 44.9,17.4 ; v1(45.5,17.4) 44.9,17.4
MTDI: TP9.1 U1.11 | length 2
  Top Layer w0.2: v1(15,5.7) 15,5.754 15.05,5.804 U1.11
  Bottom Layer w0.2: TP9.1@15,4.7 v1(15,5.7)
MTMS: TP8.1 U1.10 | length 4
  Top Layer w0.2: v1(14.4,5.8) 14.4,5.854 14.55,6.004 U1.10
  Bottom Layer w0.2: TP8.1 13.3,4.1 14.4,5.2 v1(14.4,5.8)
NetD1_1: D1.1 R17.1 | length 1.4
  Top Layer w0.25: R17.1 31.125,13.1 31.425,12.8 D1.1
NetD1_2: D1.2 R16.1 | length 1.6
  Top Layer w0.25: R16.1 30.75,12.1 31.25,11.6 31.25,11.575 31.425,11.4 D1.2
NetD1_4: D1.4 R15.1 | length 2.7
  Top Layer w0.25: R15.1 30.427,10.823 32.002,10.823 32.154,10.976 32.154,11.225 32.329,11.4 D1.4
NetL2_2: L2.2 U1.30 | length 1.1
  Top Layer w0.2: U1.30 L2.2@15.05,12.675
NetMT1_1: MT1.1 R20.1 | length 1.2
  Top Layer w0.2: R20.1 19.183,17.233 MT1.1@20.333,17.233
NetMT1_4: MT1.4 R18.2 | length 1.2
  Top Layer w0.2: R18.2@19.2,15.8 19.272,15.728 MT1.4
NetMT1_9: MT1.9 R19.2 | length 1.3
  Top Layer w0.2: MT1.9 22.677,16.214 23.814,16.214 R19.2@23.9,16.3
NetR2_1: R2.1 U1.21 | length 1.6
  Top Layer w0.2: U1.21 19.3,9.35 R2.1 R2.1@19.7,9.7
NetR6_1: R6.1 R7.1 R8.2 | length 2.1
  Top Layer w0.2: R7.1 16.225,3.125 R8.2@17.25,3.125 ; R6.1@17.2,4.1 17.25,4.05 R8.2@17.25,3.125 ; R8.2 R8.2@17.25,3.125 ; R8.2@17.3,3.1 17.275,3.125 R8.2@17.25,3.125
NetR9_2: R9.2 U2.3 | length 1.8
  Top Layer w0.2: R9.2@36.5,8.3 36.565,8.236 37.755,8.236 37.95,8.04 U2.3
NetR11_1: R11.1 TP23.1 U2.4 | length 2.5
  Top Layer w0.3: R11.1 v1(37.9,4.3) 37.919,4.319 37.919,5.319 U2.4@37.925,5.325
  Bottom Layer w0.3: TP23.1 v1(37.9,4.3)
NetR12_1: R12.1 U3.6 | length 1.7
  Top Layer w0.2: R12.1 U3.6
NetR13_2: R13.2 R14.2 TP33.1 U3.2 | length 3.8
  Top Layer w0.3: U3.2 R14.2@41.3,16.2
  Top Layer w0.5: R13.2 v1(41.5,15.3) R14.2
  Bottom Layer w0.5: v1(41.5,15.3) TP33.1
RF_ANTENNA: C3.2 L1.2 | length 1.5
  Top Layer w0.368: 9.7,14 L1.2@10.765,12.935
U0RXD: TP7.1 U1.22 | length 2.3
  Top Layer w0.2: U1.22 18.883,9.85 19.433,10.4 v1(19.8,10.4)
  Bottom Layer w0.2: TP7.1@19.8,9.9 v1(19.8,10.4)
U0TXD: R2.2 TP5.1 | length 1.3
  Top Layer w0.2: R2.2 v1(21.2,9.7)
  Bottom Layer w0.2: v1(21.2,9.7) TP5.1
USB_DN: TP3.1 U1.17 | length 1.6
  Top Layer w0.2: U1.17 18.27,7.375 18.975,7.375 v1(19,7.4)
  Bottom Layer w0.2: v1(19,7.4) TP3.1
USB_DP: TP2.1 U1.16 | length 1.6
  Top Layer w0.2: U1.16 17.575,6.63 17.575,5.925 v1(17.6,5.9)
  Bottom Layer w0.2: TP2.1 v1(17.6,5.9)
VBAT_MEAS: C6.2 R7.2 TP4.1 U1.8 | length 7.3
  Top Layer w0.2: v1@13.062,5.738 13.698,5.102 13.846,5.102 14.688,4.26 14.9,4.26 C6.2 ; v1(13.1,5.7) 13.1,6.4 12.6,6.9 12.6,7.233 12.717,7.35 U1.8 ; C6.2@15.1,4.055 16.195,4.055 R7.2
  Bottom Layer w0.2: TP4.1@12.4,5.018 v1@13.082,5.7
XTAL_IN: C4.1 L2.1 Y1.1 | length 4.2
  Top Layer w0.2: Y1.1 14.983,16.417 15.483,16.417 15.74,16.16 C4.1 ; L2.1 15.003,13.278 15.003,13.603 15.49,14.09 15.54,14.09 C4.1@15.7,14.25
XTAL_OUT: C5.1 U1.31 Y1.3 | length 4.4
  Top Layer w0.2: Y1.3@13.5,15.5 13.5,14.3 13.5,13.6 14.55,12.55 U1.31
pads on no net: MT1.2 MT1.3 MT1.10 MT1.11 U1.6 U1.7 U1.15 U1.18

## Polygon pours and split planes (outlines as drawn)
GND on Top Layer "GND_TOP" (solid, remove dead copper, pour order 2): 9.2,20 9.2,0 50,0 50,20
GND on Bottom Layer "GND_BOT" (solid, remove dead copper, pour order 0): 9.2,20 9.2,0 50,0 50,20
GND on P1 (split plane): 49.49,0.51 9.2,0.51 9.2,19.49 49.49,19.49
+3V3 on P2 (split plane): 49.49,0.51 9.2,0.51 9.2,19.49 49.49,19.49

## Keep-outs
Top Layer:
  rectangle: 9.2,1 27.2,19

## Other copper
Top Layer:
  rectangle net GND: 42.545,14.4 43.246,16.3
  rectangle net +V_BAT: 38.2,9.1 40.1,10.3
  rectangle net +V_BAT: 38.6,7.8 39.2,9.7
  rectangle net +3V3: 34.1,10 35.2,11.6
  rectangle net +3V3: 11.223,3.9 12.073,4.7
  pour cut-out: 12.6,10.6 9.1,14.1 9.1,15.1 13,11.2 13.8,11.2 13.8,10.6
  pour cut-out: 11.75,12.45 12.5,13.2 12.7,13.2 13.1,12.8 13.1,12.6 12.35,11.85
Bottom Layer:
  rectangle net +3V3: 34.2,10.1 34.4,11.5
  rectangle net +V_BAT: 38.5,9.9 40.1,10.3
  rectangle net +V_BAT: 40.4,18.4 40.9,19.3
P2 (plane layer: these items are gaps in the copper):
  rectangle: 0,0 9.2,20
P1 (plane layer: these items are gaps in the copper):
  rectangle: 0,0 9.2,20

## Silkscreen, mask and mechanical layers (free items; w line width, h text height)
Top Overlay:
  text "1" at 45.2,18.1 h1 r90
  text "MOT" at 44.888,13.7 h1 r90
  text "1" at 45.2,11.9 h1 r90
  text "BAT" at 43.6,9.3 h1 r90
  text "1" at 45.2,4.4 h1 r90
  text "PWR IN" at 41.9,1.25 h1
Top Solder:
  text ".Revision" at 36.8,1.4 h1
Bottom Solder:
  rectangle: 14.1,7.4 17.5,10.8
  rectangle: 36.1,15.2 39.1,18.2
Notes:
  drawing of 600 lines, arcs and shapes, not listed
  text "FABRICATION NOTES" at 147.325,120.325 h2.5
  text "STACK-UP" at -130,120 h2.5
  text "Layer" at -138.085,115.414 h1.52
  text "Name" at -129.348,115.414 h1.52
  text "Material" at -110.032,115.414 h1.52
  text "Thickness" at -93.314,115.414 h1.52
  text "Constant" at -80.288,115.414 h1.52
  text "Board Layer Stack" at -67.88,115.414 h1.52
  text "DESIGN INFORMATION" at 148.325,114.325 h2.5
  text "Top Overlay" at -129.348,112.366 h1.52
  text "Top Solder" at -129.348,109.318 h1.52
  text "Solder Resist" at -110.032,109.318 h1.52
  text "0.010mm" at -93.314,109.318 h1.52
  text "3.5" at -80.288,109.318 h1.52
  text "MIN. TRACK WIDTH:" at 149.325,109.325 h1.8
  text "0,152" at 205.325,109.325 h1.8
  text "mm" at 216.325,109.325 h1.8
  text "1" at -138.085,106.27 h1.52
  text "Top Layer" at -129.348,106.27 h1.52
  text "0.035mm" at -93.314,106.27 h1.52
  text "MIN. CLEARANCE:" at 149.325,105.325 h1.8
  text "0,152" at 205.325,105.325 h1.8
  text "mm" at 216.325,105.325 h1.8
  text "D1" at -129.348,103.222 h1.52
  text "FR-4" at -110.032,103.222 h1.52
  text "0.210mm" at -93.314,103.222 h1.52
  text "4.4" at -80.288,103.222 h1.52
  text "MIN. VIA PAD SIZE:" at 149.325,101.325 h1.8
  text "0,200" at 205.325,101.325 h1.8
  text "mm" at 216.325,101.325 h1.8
  text "2" at -138.085,100.174 h1.52
  text "P1" at -129.348,100.174 h1.52
  text "0.015mm" at -93.314,100.174 h1.52
  text "MIN. VIA ANTI-PAD SIZE:" at 149.325,97.325 h1.8
  text "0,100" at 205.325,97.325 h1.8
  text "mm" at 216.325,97.325 h1.8
  text "D2" at -129.348,97.126 h1.52
  text "FR-4" at -110.032,97.126 h1.52
  text "0.450mm" at -93.314,97.126 h1.52
  text "4.6" at -80.288,97.126 h1.52
  text "3" at -138.085,94.078 h1.52
  text "P2" at -129.348,94.078 h1.52
  text "0.015mm" at -93.314,94.078 h1.52
  text "MIN. ANNULAR RING:" at 149.325,93.325 h1.8
  text "EXTERNAL" at 186.325,93.325 h1.8
  text "0,100" at 205.325,93.325 h1.8
  text "mm" at 216.325,93.325 h1.8
  text "D3" at -129.348,91.03 h1.52
  text "FR-4" at -110.032,91.03 h1.52
  text "0.210mm" at -93.314,91.03 h1.52
  text "4.4" at -80.288,91.03 h1.52
  text "INTERNAL" at 186.325,90.325 h1.8
  text "0,100" at 205.325,90.325 h1.8
  text "mm" at 216.325,90.325 h1.8
  text "4" at -138.085,87.982 h1.52
  text "Bottom Layer" at -129.348,87.982 h1.52
  text "0.035mm" at -93.314,87.982 h1.52
  text "PER IPC-2221 CLASS 2 LEVEL C" at 179.325,86.325 h1.8
  text "Bottom Solder" at -129.348,84.934 h1.52
  text "Solder Resist" at -110.032,84.934 h1.52
  text "0.010mm" at -93.314,84.934 h1.52
  text "3.5" at -80.288,84.934 h1.52
  text "Bottom Overlay" at -129.348,81.886 h1.52
  text "REGISTRATION TOLERANCES:" at 149.325,81.325 h1.8
  text "METAL" at 186.325,81.325 h1.8
  text "+" at 196.325,81.325 h1.8
  text "0,10" at 198.325,81.325 h1.8
  text "-" at 206.325,81.325 h1.8
  text "0,05" at 208.325,81.325 h1.8
  text "mm" at 216.325,81.325 h1.8
  text "Total board thickness:" at -138.085,78.838 h1.52
  text "0.991mm" at -93.314,78.838 h1.52
  text "HOLES" at 186.325,78.325 h1.8
  text "+" at 196.325,78.325 h1.8
  text "0,10" at 198.325,78.325 h1.8
  text "-" at 206.325,78.325 h1.8
  text "0,05" at 208.325,78.325 h1.8
  text "mm" at 216.325,78.325 h1.8
  text "PCB INFORMATION" at 148.325,72.325 h2.5
  text "MATERIAL:" at 149.325,67.325 h1.8
  text "FR-4" at 170.325,67.325 h1.8
  text "FR-4 HT" at 181.325,67.325 h1.8
  text "OTHER" at 197.325,67.325 h1.8
  text "THICKNESS:" at 149.325,63.325 h1.8
  text "1.0mm +-10%" at 170.325,63.325 h1.8
  text "OTHER" at 193.325,63.325 h1.8
  text "LAYERS:" at 149.325,59.325 h1.8
  text "2" at 170.325,59.325 h1.8
  text "4" at 177.325,59.325 h1.8
  text "6" at 184.325,59.325 h1.8
  text "8" at 191.325,59.325 h1.8
  text "10" at 198.325,59.325 h1.8
  text "12" at 206.325,59.325 h1.8
  text "DRILLING:" at 149.325,55.325 h1.8
  text "MECH. LAYER GD1" at 170.325,55.325 h1.8
  text "NC DRILL FILES" at 198.325,55.325 h1.8
  text "BOARD FINISH:" at 149.325,51.325 h1.8
  text "SILKSCREEN:" at 154.325,48.325 h1.8
  text "TOP" at 186.325,48.325 h1.8
  text "BOTTOM" at 199.325,48.325 h1.8
  text "SILKSCREEN COLOR:" at 154.325,45.325 h1.8
  text "WHITE" at 186.325,45.325 h1.8
  text "OTHER" at 199.325,45.325 h1.8
  text "SOLDER MASK COLOR:" at 154.325,42.325 h1.8
  text "GREEN" at 186.325,42.325 h1.8
  text "RED" at 199.325,42.325 h1.8
  text "BLACK" at 186.325,39.325 h1.8
  text "OTHER" at 199.325,39.325 h1.8
  text "SURFACE FINISH:" at 149.325,35.325 h1.8
  text "HASL" at 186.325,35.325 h1.8
  text "ENIG" at 199.325,35.325 h1.8
  text "ENEPIG" at 186.325,32.325 h1.8
  text "OTHER" at 199.325,32.325 h1.8
  text "MECHANICAL FINISH:" at 149.325,27.325 h1.8
  text "V. SCORE" at 186.325,27.325 h1.8
  text "MECH. L. GM3" at 199.325,27.325 h1.8
  text "N.C. CUT" at 186.325,24.325 h1.8
  text "MECH. L. GM4" at 199.325,24.325 h1.8
  text "CHAMFER" at 186.325,21.325 h1.8
  text "EDGE PLATING" at 186.325,18.325 h1.8
  text "OTHER" at 186.325,15.325 h1.8
  text "CERTIFICATION:" at 149.325,10.325 h1.8
  text "RoHS and REACH unaffected" at 186.325,10.325 h1.7
  text "IPC-A-600" at 186.325,7.325 h1.8
  text "CLASS" at 208.325,7.325 h1.8
  text "2" at 218.325,7.325 h1.8
  text "UL 94V-0" at 186.325,4.325 h1.8
  text "UL796" at 203.825,2.125 h1.8
  text "OTHER" at 186.325,1.325 h1.8
  text "ADDITIONAL INFORMATION:" at 149.325,-3.675 h1.8
  text "ELECTRICAL TEST:" at 154.325,-6.675 h1.8
  text "NONE" at 186.325,-6.675 h1.8
  text "REQUIRED" at 201.325,-6.675 h1.8
  text "PER ORDER" at 186.325,-9.675 h1.8
  text "VIA:" at 154.325,-14.675 h1.8
  text "PLUGGED" at 186.325,-14.675 h1.8
  text "FILLED" at 186.325,-17.675 h1.8
  text "IN PAD" at 186.325,-20.675 h1.8
  text "BLIND" at 186.325,-23.675 h1.8
  text "TOP" at 201.325,-23.675 h1.8
  text "BOTTOM" at 211.325,-23.675 h1.8
  text "BURRIED" at 186.325,-26.675 h1.8
  text "IMPEDANCE CONTROL:" at 154.325,-30.675 h1.8
  text "DIFF 100" at 186.325,-30.675 h1.8
  text "DIFF 90" at 201.325,-30.675 h1.8
  text "SE 50" at 186.325,-33.675 h1.8
  text "PER ORDER" at 201.325,-33.675 h1.8
  text "OTHER NOTES:" at 154.325,-38.675 h1.8
Drill Drawing:
  circle w0.15: c-39.909,112.457 r0.847
  lines w0.15: -40.755,109.493 -39.062,109.493 -39.909,107.8 -40.755,109.493
  lines w0.2: -42.241,106.657 109.563,106.657 ; -42.241,114.277 109.563,114.277 ; -29.809,102.847 -29.809,118.087 ; -17.486,102.847 -17.486,118.087 ; -3.523,102.847 -3.523,118.087 ; 16.857,102.847 16.857,118.087 ; 26.606,102.847 26.606,118.087 ; 41.239,102.847 41.239,118.087 ; 53.382,102.847 53.382,118.087 ; 92.725,102.847 92.725,118.087 ; -42.241,102.847 109.563,102.847 109.563,118.087 -42.241,118.087 -42.241,102.847
  text "DRILL TABLE" at -30,120 h2.5
  text "Symbol" at -39.955,115.42 h1.83
  text "Count" at -28.666,115.42 h1.83
  text "Hole Size" at -16.343,115.42 h1.83
  text "Hole Tolerance" at -2.38,115.42 h1.83
  text "Plated" at 18,115.42 h1.83
  text "Hole Type" at 27.749,115.42 h1.83
  text "Via/Pad" at 42.382,115.42 h1.83
  text "Template" at 54.525,115.42 h1.83
  text "Description" at 93.868,115.42 h1.83
  text "294" at -28.666,111.61 h1.52
  text "0.200mm" at -16.343,111.61 h1.52
  text "+/-0.050mm" at -2.38,111.61 h1.52
  text "PTH" at 18,111.61 h1.52
  text "Round" at 27.749,111.61 h1.52
  text "Via" at 42.382,111.61 h1.52
  text "v40h20m0mx0(Tol5-5)" at 54.525,111.61 h1.52
  text "2" at -28.666,107.8 h1.52
  text "2.200mm" at -16.343,107.8 h1.52
  text "+/-0.100mm" at -2.38,107.8 h1.52
  text "NPTH" at 18,107.8 h1.52
  text "Round" at 27.749,107.8 h1.52
  text "Pad" at 42.382,107.8 h1.52
  text "c370hn220(Tol10-10)_2670034071" at 54.525,107.8 h1.52
  text "296 Total" at -28.666,103.99 h1.52
Drawing:
  rectangle: 212.527,-111.369 217.527,-106.369
  rectangle: 217.527,-116.369 222.527,-111.369
  rectangle: 222.527,-111.369 232.527,-106.369
  lines w0.25: 212.527,-111.369 232.527,-111.369 ; 217.527,-116.369 217.527,-106.369 ; 222.527,-116.369 222.527,-106.369 ; 212.527,-116.369 232.527,-116.369 232.527,-106.369 212.527,-106.369 212.527,-116.369
  lines w0.35: -159.473,-107.869 -154.473,-107.869 ; -159.473,-57.869 -154.473,-57.869 ; -159.473,42.131 -154.473,42.131 ; -159.473,92.131 -154.473,92.131 ; -109.473,-151.369 -109.473,-146.369 ; -109.473,130.631 -109.473,135.631 ; -59.473,-151.369 -59.473,-146.369 ; -59.473,130.631 -59.473,135.631 ; -9.473,-151.369 -9.473,-146.369 ; -9.473,130.631 -9.473,135.631 ; 90.527,-151.369 90.527,-146.369 ; 90.527,130.631 90.527,135.631 ; 124.527,-146.369 124.527,-128.369 ; 124.527,-137.369 235.527,-137.369 ; 140.527,-151.369 140.527,-146.369 ; 140.527,130.631 140.527,135.631 ; 163.527,-146.369 163.527,-137.369 ; 184.527,-146.369 184.527,-119.369 ; 190.527,-151.369 190.527,-146.369 ; 190.527,130.631 190.527,135.631 ; 209.527,-146.369 209.527,-137.369 ; 225.527,-146.369 225.527,-137.369 ; 235.527,-128.369 124.527,-128.369 ; 235.527,-119.369 124.527,-119.369 124.527,-128.369 ; 235.527,-107.869 240.527,-107.869 ; 235.527,-57.869 240.527,-57.869 ; 235.527,42.131 240.527,42.131 ; 235.527,92.131 240.527,92.131
  lines w0.7: -159.473,-7.869 -149.473,-7.869 ; 40.527,-151.369 40.527,-141.369 ; 40.527,125.631 40.527,135.631 ; 230.527,-7.869 240.527,-7.869 ; -159.473,-151.369 -159.473,135.631 240.527,135.631 240.527,-151.369 -159.473,-151.369 ; -154.473,-146.369 -154.473,130.631 235.527,130.631 235.527,-146.369 -154.473,-146.369
  text "1" at -134.473,131.131 h3.5
  text "2" at -84.473,131.131 h3.5
  text "3" at -34.473,131.131 h3.5
  text "4" at 15.527,131.131 h3.5
  text "5" at 65.527,131.131 h3.5
  text "6" at 115.527,131.131 h3.5
  text "7" at 165.527,131.131 h3.5
  text "8" at 215.527,131.131 h3.5
  text "A" at -158.473,117.131 h3.5
  text "A" at 236.527,117.131 h3.5
  text "B" at -158.473,67.131 h3.5
  text "B" at 236.527,67.131 h3.5
  text "C" at -158.473,17.131 h3.5
  text "C" at 236.527,17.131 h3.5
  text "D" at -158.473,-32.869 h3.5
  text "D" at 236.527,-32.869 h3.5
  text "E" at -158.473,-82.869 h3.5
  text "E" at 236.527,-82.869 h3.5
  text "Document title" at 125.527,-122.369 h1.8
  text "Designed by" at 185.527,-122.369 h1.8
  text ".Printout_Name" at 126.527,-126.369 h2.5
  text ".pcb_designer" at 186.527,-126.369 h2.5
  text "Project title" at 125.527,-131.369 h1.8
  text "Architect" at 185.527,-131.369 h1.8
  text "F" at -158.473,-132.869 h3.5
  text "F" at 236.527,-132.869 h3.5
  text ".project_title" at 126.527,-135.369 h2.5
  text ".architect" at 186.527,-135.369 h2.5
  text "Project variant" at 125.527,-140.369 h1.8
  text "Project revision" at 164.527,-140.369 h1.8
  text "Release date" at 185.527,-140.369 h1.8
  text "Scale" at 210.527,-140.369 h1.8
  text "Size" at 226.527,-140.369 h1.8
  text "'.VariantName'" at 126.527,-144.369 h2.5
  text ".Revision" at 170.527,-144.369 h2.5
  text "'.Print_Date'" at 185.527,-144.369 h2.5
  text "1 : 1" at 213.527,-144.369 h2.5
  text "A3" at 228.527,-144.369 h2.5
  text "1" at -134.473,-150.869 h3.5
  text "2" at -84.473,-150.869 h3.5
  text "3" at -34.473,-150.869 h3.5
  text "4" at 15.527,-150.869 h3.5
  text "5" at 65.527,-150.869 h3.5
  text "6" at 115.527,-150.869 h3.5
  text "7" at 165.527,-150.869 h3.5
  text "8" at 215.527,-150.869 h3.5

## Dimensions
212.527,-106.369 to 232.527,-106.369 on Bottom Courtyard (Mech16)